# EAGLE board 6waydistro (EAGLE 9.0.1)
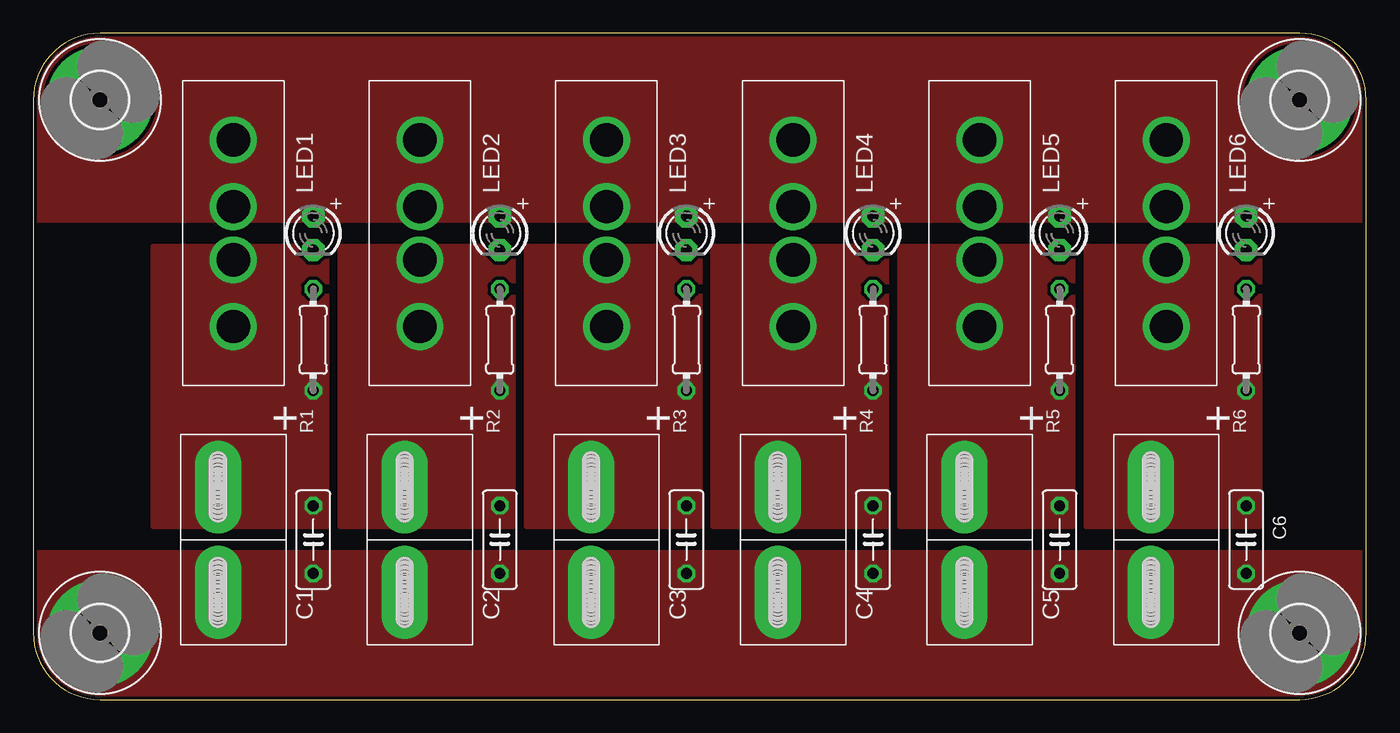
[diagram p0: board, top side]
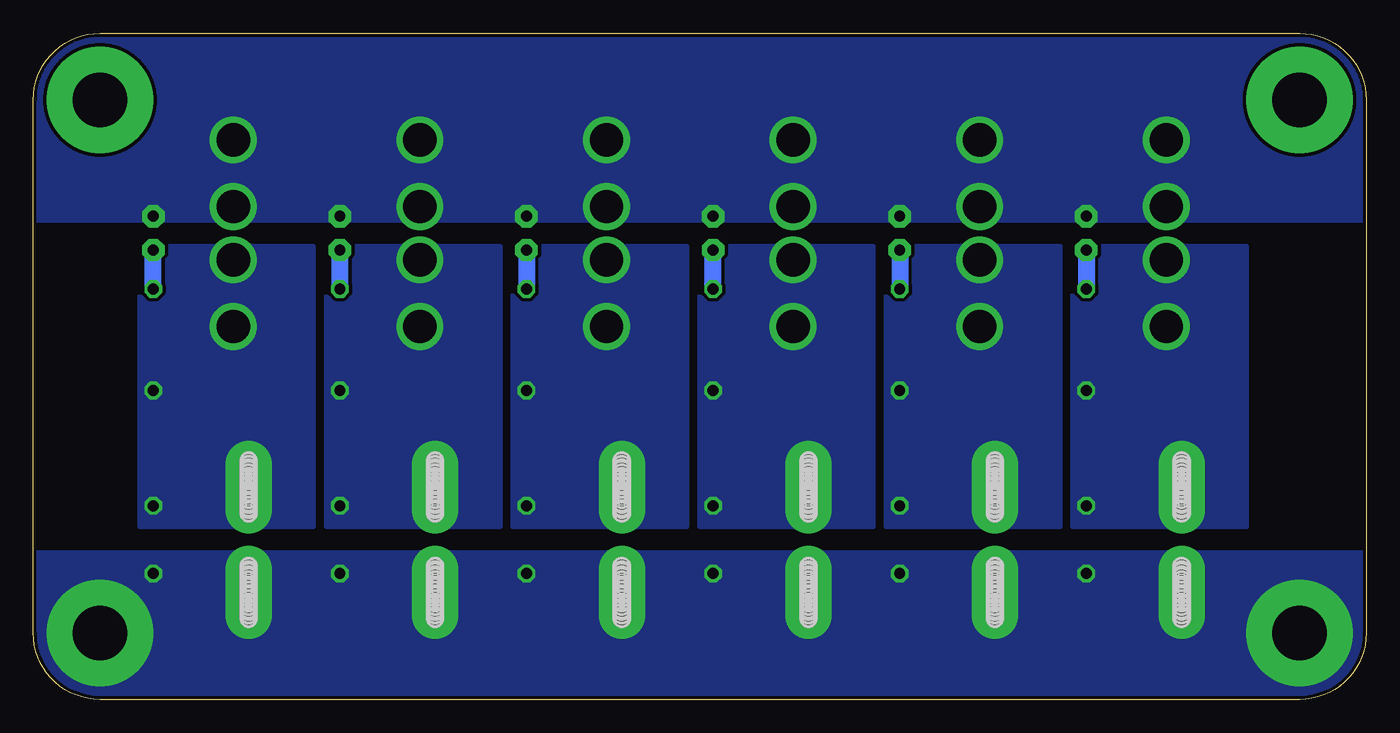
[diagram p1: board, bottom side, seen from below]

Size 100 x 50 mm. Coordinates in mm from the lower left corner, seen from the top.
Outline: 95,50 5,50 arc90 0,45 0,5 arc90 5,0 95,0 arc90 100,5 100,45 arc90 95,50
Copper layers (1*16): Top 0.035mm / dielectric 1.5mm / Bottom 0.035mm
Design rules "dirt_cheap_dirty_boards.v1 *": minimum track width 5mil, minimum drill 12mil, track to track 10mil, track to pad 10mil, pad to pad 5mil, via to via 5mil, smd to smd 0mil, copper to edge 10mil, drill to drill 10mil, minimum pad ring 10mil, minimum via ring 6mil, stop-mask expansion 2mil, vias tented up to drill 25mil, thermal gap 10mil

## Footprints (pad centres in the part's own frame; a part is rotated, then mirrored left to right if it is on the bottom)
C050-025X075 = drill 0.813 octagon: 1 -2.54,0; 2 2.54,0
4,1-PAD = drill 4.1 pad 8: B4,1 0,0
POWERPOLE_PAIR_45A = drill 1.27 pad 3.5 long: BLACK 3.95,-1.15; RED -3.95,-1.15 | hole 1.27: -1.97,-1.15; -5.93,-1.15; 1.97,-1.15; 5.93,-1.15; -4.66,-1.15; -3.39,-1.15; 3.24,-1.15; 4.66,-1.15; -5.676,-1.15; -5.803,-1.15; -5.549,-1.15; -5.422,-1.15; -5.295,-1.15; -5.168,-1.15; -5.041,-1.15; -4.914,-1.15; -4.787,-1.15; -2.097,-1.15; -2.224,-1.15; -2.351,-1.15; -2.478,-1.15; -2.605,-1.15; -2.732,-1.15; -2.986,-1.15; -2.859,-1.15; -3.113,-1.15; -3.24,-1.15; -3.517,-1.15; -3.644,-1.15; -3.771,-1.15; -3.898,-1.15; -4.025,-1.15; -4.152,-1.15; -4.279,-1.15; -4.406,-1.15; -4.533,-1.15; 5.803,-1.15; 5.676,-1.15; 5.549,-1.15; 5.422,-1.15; 5.295,-1.15; 5.168,-1.15; 5.041,-1.15; 4.914,-1.15; 4.787,-1.15; 4.533,-1.15; 4.406,-1.15; 4.279,-1.15; 4.025,-1.15; 4.025,-1.15; 4.152,-1.15; 3.898,-1.15; 3.771,-1.15; 3.771,-1.15; 3.644,-1.15; 3.644,-1.15; 3.644,-1.15; 3.517,-1.15; 3.517,-1.15; 3.39,-1.15; 3.113,-1.15; 2.986,-1.15; 2.859,-1.15; 2.732,-1.15; 2.605,-1.15; 2.478,-1.15; 2.351,-1.15; 2.224,-1.15; 2.097,-1.15
FUSE_ATC = drill 2.5: P$1 -2,0; P$2 -7,0; P$3 2,0; P$4 7,0
LED3MM = drill 0.813 pad 1.676 octagon: A -1.27,0; K 1.27,0
0204/7 = drill 0.813 octagon: 1 -3.81,0; 2 3.81,0

## Placement (x,y rotation side)
C1  [C050-025X075]  21,12 90 top
C2  [C050-025X075]  35,12 90 top
C3  [C050-025X075]  49,12 90 top
C4  [C050-025X075]  63,12 90 top
C5  [C050-025X075]  77,12 90 top
C6  [C050-025X075]  91,12 90 top
H3  MOUNT-PAD-ROUND4.1  [4,1-PAD]  5,5 0 top
H4  MOUNT-PAD-ROUND4.1  [4,1-PAD]  95,5 0 top
H5  MOUNT-PAD-ROUND4.1  [4,1-PAD]  95,45 0 top
H6  MOUNT-PAD-ROUND4.1  [4,1-PAD]  5,45 0 top
J1  POWERPOLE_POWER45A  [POWERPOLE_PAIR_45A]  15,12 270 top
J2  FUSEATC  [FUSE_ATC]  15,35 90 top
J3  POWERPOLE_POWER45A  [POWERPOLE_PAIR_45A]  29,12 270 top
J4  FUSEATC  [FUSE_ATC]  29,35 90 top
J5  POWERPOLE_POWER45A  [POWERPOLE_PAIR_45A]  43,12 270 top
J6  FUSEATC  [FUSE_ATC]  43,35 90 top
J7  POWERPOLE_POWER45A  [POWERPOLE_PAIR_45A]  57,12 270 top
J8  FUSEATC  [FUSE_ATC]  57,35 90 top
J9  POWERPOLE_POWER45A  [POWERPOLE_PAIR_45A]  71,12 270 top
J10  FUSEATC  [FUSE_ATC]  71,35 90 top
J11  POWERPOLE_POWER45A  [POWERPOLE_PAIR_45A]  85,12 270 top
J12  FUSEATC  [FUSE_ATC]  85,35 90 top
LED1  [LED3MM]  21,35 270 top
LED2  [LED3MM]  35,35 270 top
LED3  [LED3MM]  49,35 270 top
LED4  [LED3MM]  63,35 270 top
LED5  [LED3MM]  77,35 270 top
LED6  [LED3MM]  91,35 270 top
R1  [0204/7]  21,27 90 top
R2  [0204/7]  35,27 90 top
R3  [0204/7]  49,27 90 top
R4  [0204/7]  63,27 90 top
R5  [0204/7]  77,27 90 top
R6  [0204/7]  91,27 90 top

## Library data of the parts
C1-C6 = resistor
H3-H6 = holes
J1-J12 = powerpoles
LED1-LED6 = adafruit
R1-R6 = rcl

## Nets
GND: C1.1 C2.1 C3.1 C4.1 C5.1 C6.1 H3.B4,1 H4.B4,1 J1.BLACK J3.BLACK J5.BLACK J7.BLACK J9.BLACK J11.BLACK
N$1: LED2.K R2.2
N$2: LED1.K R1.2
N$3: LED3.K R3.2
N$4: LED4.K R4.2
N$5: LED5.K R5.2
N$6: LED6.K R6.2
PPV1: C1.2 J1.RED J2.P$1 J2.P$2 R1.1
PPV2: C2.2 J3.RED J4.P$1 J4.P$2 R2.1
PPV3: C3.2 J5.RED J6.P$1 J6.P$2 R3.1
PPV4: C4.2 J7.RED J8.P$1 J8.P$2 R4.1
PPV5: C5.2 J9.RED J10.P$1 J10.P$2 R5.1
PPV6: C6.2 J11.RED J12.P$1 J12.P$2 R6.1
VCC: J2.P$3 J2.P$4 J4.P$3 J4.P$4 J6.P$3 J6.P$4 J8.P$3 J8.P$4 J10.P$3 J10.P$4 J12.P$3 J12.P$4 LED1.A LED2.A LED3.A LED4.A LED5.A LED6.A

## Tracks (layer width: path | path; a pad name or v marks a point on that pad's centre or on a via)
GND
  pour Top (no thermals): 9,11 102,11 102,-2 -2,-2 -2,11
  pour Bottom (no thermals): 9,11 102,11 102,-2 -2,-2 -2,11
N$1
  Bottom 1.27: LED2.K R2.2
N$2
  Bottom 1.27: LED1.K R1.2
N$3
  Bottom 1.27: R3.2 LED3.K
N$4
  Bottom 1.27: LED4.K R4.2
N$5
  Bottom 1.27: R5.2 LED5.K
N$6
  Bottom 1.27: R6.2 LED6.K
PPV1
  pour Top (no thermals): 9,34 22,34 22,13 9,13
  pour Bottom (no thermals): 9,34 22,34 22,13 9,13
PPV2
  pour Top (no thermals): 23,34 36,34 36,13 23,13
  pour Bottom (no thermals): 23,34 36,34 36,13 23,13
PPV3
  pour Top (no thermals): 37,34 50,34 50,13 37,13
  pour Bottom (no thermals): 37,34 50,34 50,13 37,13
PPV4
  pour Top (no thermals): 51,34 51,13 64,13 64,34
  pour Bottom (no thermals): 51,34 51,13 64,13 64,34
PPV5
  pour Top (no thermals): 65,34 65,13 78,13 78,34
  pour Bottom (no thermals): 65,34 65,13 78,13 78,34
PPV6
  pour Top (no thermals): 92,34 92,13 79,13 79,34
  pour Bottom (no thermals): 92,34 92,13 79,13 79,34
VCC
  pour Top (no thermals): -2,36 102,36 102,52 -2,52
  pour Bottom (no thermals): -2,36 102,36 102,52 -2,52